# Altium PCB Powerboard in ROV V1.0.PcbDoc
Units mm, origin at the board's own origin, x right, y up, seen from the top; angles counter-clockwise.
Board outline 305.01 x 80 mm, 2 copper layers (Top Layer, Bottom Layer); 23 components, 13 nets, 142 pads, 192 vias.
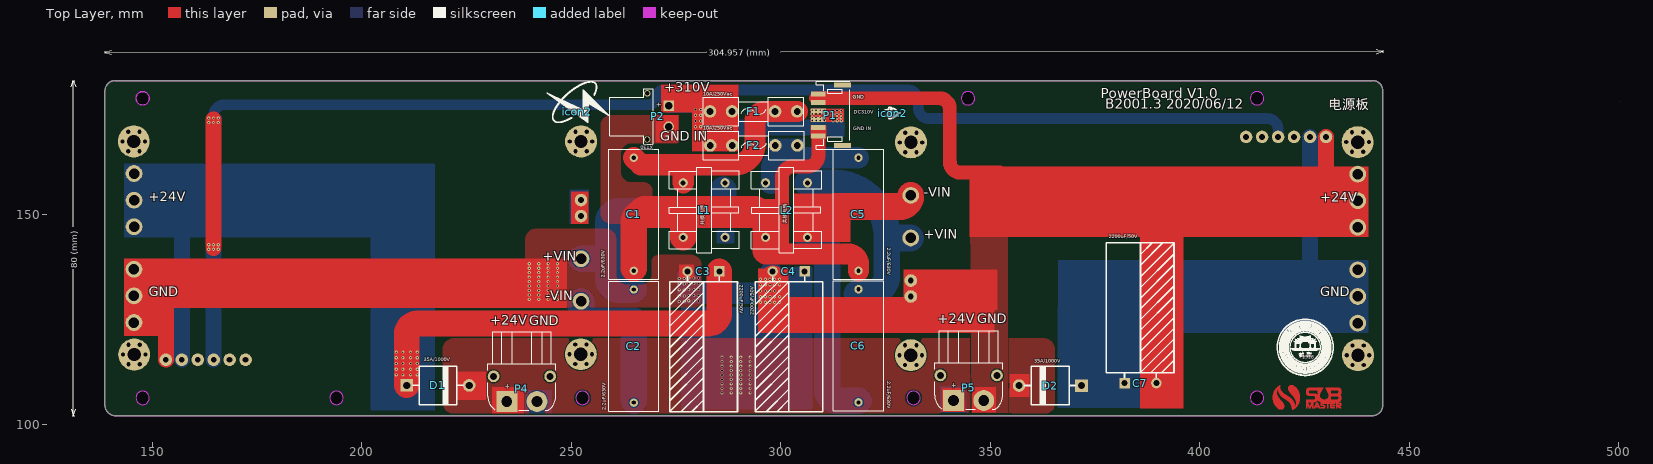
[diagram p0: Top Layer view]
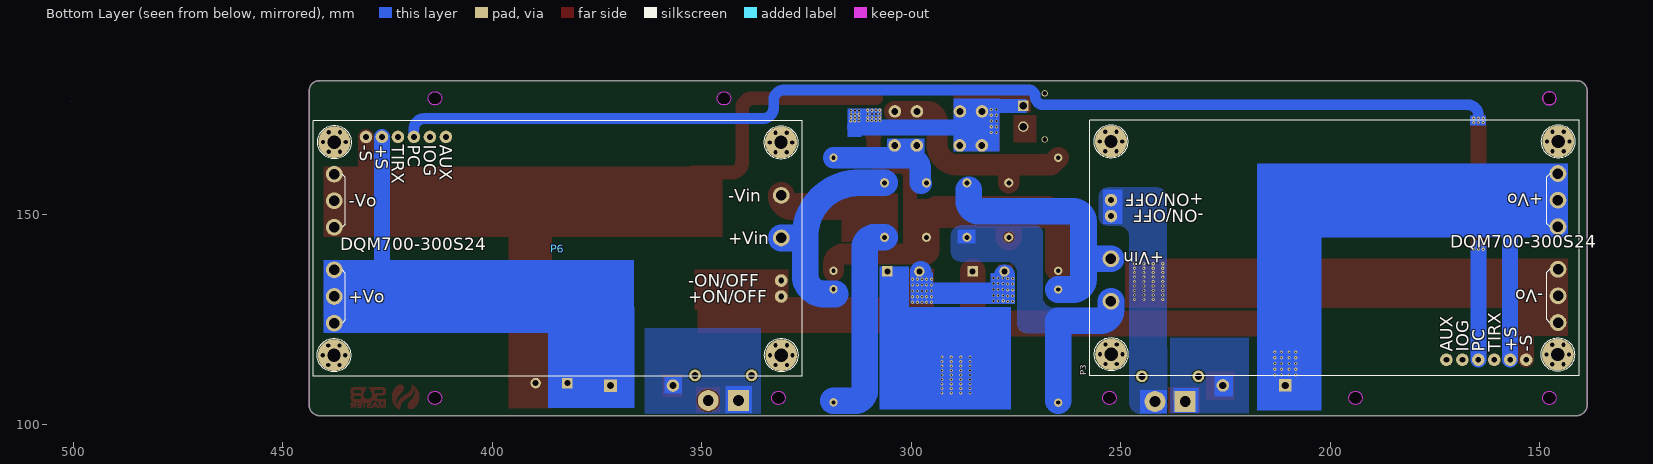
[diagram p1: Bottom Layer view, seen from below]
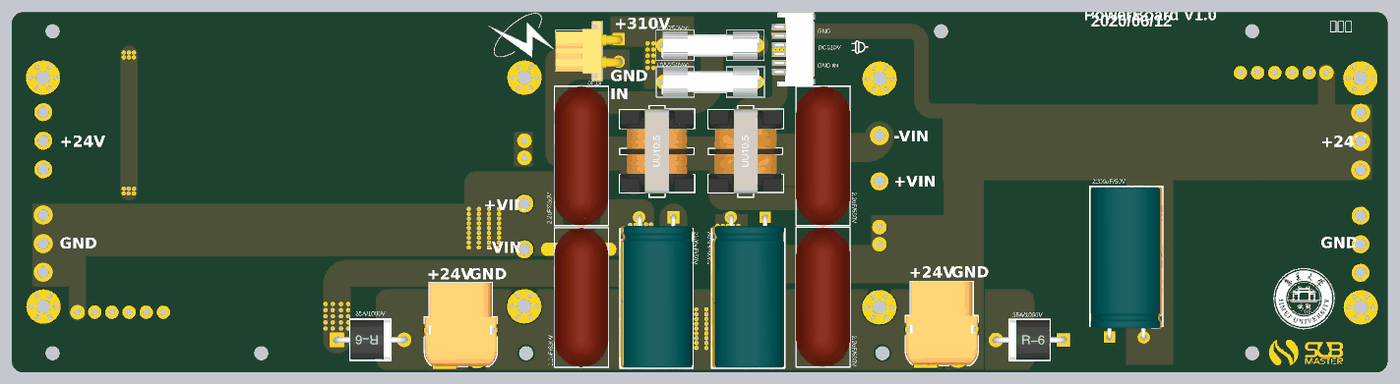
[diagram p2: 3D render of the assembled board from above, using the file's embedded part models]

## Layer stack, top to bottom
Top Solder: solder mask 0.0102, Solder Resist, Dk 3.5
Top Layer: signal copper 0.0356
Dielectric 1: dielectric 0.32, FR-4, Dk 4.8
Bottom Layer: signal copper 0.0356
Bottom Solder: solder mask 0.0102, Solder Resist, Dk 3.5

## Board outline
138.73,104.5 ccw(c141.23,104.5) 141.23,102 441.25,102 ccw(c441.25,104.488) 443.738,104.488 443.738,179.512 ccw(c441.25,179.512) 441.25,182 141.23,182 ccw(c141.23,179.5) 138.73,179.5
cut-out: 192.4,106.25 ccw(c194,106.25) 194,104.65 ccw(c194,106.25) 195.6,106.25 ccw(c194,106.25) 194,107.85 ccw(c194,106.25)
cut-out: 146.138,106.25 ccw(c147.738,106.25) 147.738,104.65 ccw(c147.738,106.25) 149.338,106.25 ccw(c147.738,106.25) 147.738,107.85 ccw(c147.738,106.25)
cut-out: 147.738,176.15 cw(c147.738,177.75) 146.138,177.75 cw(c147.738,177.75) 147.738,179.35 cw(c147.738,177.75) 149.338,177.75 cw(c147.738,177.75)
cut-out: 343.138,177.75 ccw(c344.738,177.75) 344.738,176.15 ccw(c344.738,177.75) 346.338,177.75 ccw(c344.738,177.75) 344.738,179.35 ccw(c344.738,177.75)
cut-out: 412.138,177.75 ccw(c413.738,177.75) 413.738,176.15 ccw(c413.738,177.75) 415.338,177.75 ccw(c413.738,177.75) 413.738,179.35 ccw(c413.738,177.75)
cut-out: 330.138,106.25 ccw(c331.738,106.25) 331.738,104.65 ccw(c331.738,106.25) 333.338,106.25 ccw(c331.738,106.25) 331.738,107.85 ccw(c331.738,106.25)
cut-out: 412.138,106.25 ccw(c413.738,106.25) 413.738,104.65 ccw(c413.738,106.25) 415.338,106.25 ccw(c413.738,106.25) 413.738,107.85 ccw(c413.738,106.25)
cut-out: 251.138,106.25 ccw(c252.738,106.25) 252.738,104.65 ccw(c252.738,106.25) 254.338,106.25 ccw(c252.738,106.25) 252.738,107.85 ccw(c252.738,106.25)

## Design rules (kind name [scope] priority, off if disabled: settings)
Clearance [All] p1: gap=0.254
ComponentClearance [All] p1: gap=0 collisioncheckmode=3 verticalgap=0 showdistances=FALSE
Height [All] p1: minheight=0 maxheight=32 prefheight=12.7
PolygonConnect [All] p1: connectstyle=Relief reliefconductorwidth=0.254 reliefentries=4 polygonreliefangle="90 Angle" airgapwidth=0.254
RoutingVias [All] p1: holewidth=0.711 width=1.27 viastyle="Through Hole" minholewidth=0.711 minwidth=1.27 maxholewidth=0.711 maxwidth=1.27
SolderMaskExpansion [All] p1: expansion=0.102
Width [All] p1: maxlimit=50.8 minlimit=0.254 preferedwidth=0.254 minimp=50.000000 maximp=50.000000 favimp=50.000000
28 further rules are at their usual default settings.

## Classes and differential pairs
component class "Powerboard in ROV V1.0": C1 C2 C3 C4 C5 C6 C7 D1 D2 F1 F2 L1 L2 P1 P2 P3 P4 P5 P6

## Components (designator, comment, footprint, x,y, rotation, side; value= is the part's Value field where it differs from the comment)
C1 "2.2uF/630V" "CCB 电容(27mm)" 263.449,149.867 r90 top
C2 "2.2uF/630V" "CCB 电容(27mm)" 266.497,118.821 r270 top
C3 "2200uF/50V" "CAP 7.5*16*31.5-H - GD" 280.797,119.558 r180 top
C4 "2200uF/50V" "CAP 7.5*16*31.5-H - GD" 301.117,119.558 r180 top
C5 "2.2uF/630V" "CCB 电容(27mm)" 317.068,149.867 r90 top
C6 "2.2uF/630V" "CCB 电容(27mm)" 320.116,118.891 r270 top
C7 "2200uF/50V" "CAP 7.5*16*31.5-H - GD" 386.685,126.643 r0 top
D1 "35A/1000V" R-6 217.696,109.195 r0 top
D2 "35A/1000V" R-6 364.896,109.22 r180 top
F1 "10A/250Vac" "FU 5x20" 294.234,174.295 r0 top
F2 "10A/250Vac" "FU 5x20" 294.284,166.167 r0 top
icon2 "" "LOGO 电源" 326.72,174.193 r90 top
icon2 "" LOGO_Thunder 251.435,174.6 r270 top
L1 "共模电感" UU10.5#1 281.762,151.079 r90 top
L2 "共模电感" UU10.5#2 301.668,151.409 r90 top
P1 "6PIN" PH2.0WS-6P 312.395,173.99 r90 top locked
P2 "XT30" XT30PW-F 267.183,173.431 r270 top
P3 "全砖电源模块" 全砖电源模块 198.857,141.376 r0 bottom locked
P4 "电源端子" XT60PW-F 238.69,109.117 r180 top
P5 "电源端子" XT60PW-F 345.338,109.347 r180 top
P6 "全砖电源模块" 全砖电源模块 384.581,142.519 r180 bottom locked
? "" JMU_LOGO(1.35cm) 425.273,118.085 r0 bottom
? "Comment" "Sub master logo" 420.421,106.223 r0 top

## Footprints (in the part's own frame and the unit in brackets; to place one, negate y for a bottom-side part, rotate by r counter-clockwise, add the part's x,y. Pads: shape width x height; smd on the part's side, far side on the other; paste and mask are expansions set on the pad)
"CAP 7.5*16*31.5-H - GD" [mm] "脚距7.5mm直径16mm高度31.5mm"
  rect 2.5x2.5 hole 1.4: 1(-4.593,-16.864)
  round 2.5 hole 1.4: 2(3.007,-16.864)
  silkscreen extent -8.92,-15.63 7.21,16.63, body extent -8.84,-17.36 7.17,16.55, height 16.03
"CCB 电容(27mm)" [mm]
  round 2 hole 1: 1(-13.291,-1.524) 2(13.709,-1.524)
  silkscreen extent -15.29,-7.52 15.71,4.48, body extent -15.29,-7.52 15.71,4.48, height 23.5
"FU 5x20" [mm] "5*20保险管底座夹子"
  round 3 hole 1.6: 1(-11.086,0.33) 1(-5.816,0.33) 2(4.444,0.33) 2(9.714,0.33)
  silkscreen extent -12.69,-3.05 11.31,3.71, body extent -11.49,-2.82 10.11,3.48, height 9.77
JMU_LOGO(1.35cm) [mm]
"LOGO 电源" [mm]
  silkscreen extent -1.47,-1.85 1.57,1.77
LOGO_Thunder [mm]
  silkscreen extent -7.24,-7.19 2.67,7.62
PH2.0WS-6P [mm]
  rect 1.2x4 smd: 0(-7.453,-2.365) 0(6.947,-2.365)
  rect 1.2x3.5 smd: 1(-5.253,3.385) 2(-3.253,3.385) 3(-1.253,3.385) 4(0.747,3.385) 5(2.747,3.385) 6(4.747,3.385)
  silkscreen extent -8.35,-4.14 7.84,3.86, body extent -8.25,-4.01 7.75,4.59, height 5.55
R-6 [mm] "二极管"
  rect 3x3 hole 1.7: 1(-6.917,0.025)
  round 3 hole 1.7: 2(7.983,0.025)
  silkscreen extent -5.52,-4.55 6.56,4.6, body extent -7.57,-4.38 8.63,4.43, height 8.85
"Sub master logo" [mm]
  Top Layer drawing of 1550 lines, arcs and shapes, not listed
UU10.5#1 [mm] "18*16*20mm(长宽高）"
  round 2.2 hole 1.2: 1(-6.5,5) 2(-6.5,-5) 3(6.5,-5) 4(6.5,5)
  silkscreen extent -10.16,-8.38 10.16,8.38, body extent -9.4,-8 9.4,8, height 21.05
UU10.5#2 [mm] "18*16*20mm(长宽高）"
  round 2.2 hole 1.2: 1(-6.83,5.254) 2(-6.83,-4.746) 3(6.17,-4.746) 4(6.17,5.254)
  silkscreen extent -10.49,-8.13 9.83,8.64, body extent -9.73,-7.75 9.07,8.25, height 21.05
XT30PW-F [mm] "ĸͷ"
  rect 2.5x2.5 hole 1.8: 1(-2.566,6.095)
  round 2.5 hole 1.8: 2(2.434,6.095)
  round 1.5 hole 1.1: ""(-5.5,1) ""(5.5,1)
  silkscreen extent -6.55,-7.95 6.71,2.41, body extent -6.55,-7.95 6.75,6.95, height 5
XT60PW-F [mm] "ĸͷ"
  round 2.8 hole 1.7: 0(-6.305,-2.268) 0(7.195,-2.268)
  rect 5x5 hole 2.6: 1(4.045,3.732)
  round 5 hole 2.6: 2(-3.155,3.732)
  silkscreen extent -7.66,-12.87 8.54,5.83, body extent -7.56,-12.87 8.44,5.75, height 8.65
全砖电源模块 [mil]
  round 40 hole 40: 0(-2202,-1026.57) 0(-2198.05,975.51) 0(-2149,-1118.37) 0(-2149,-934.78) 0(-2145.05,883.71) 0(-2145.05,1067.31) 0(-2043,-1118.37) 0(-2043,-934.78) 0(-2039.05,883.71) 0(-2039.05,1067.31) 0(-1990,-1026.57) 0(-1986.05,975.51) 0(1998.83,972.78) 0(2000.98,-1026.35) 0(2051.83,880.98) 0(2051.83,1064.57) 0(2053.98,-1118.15) 0(2053.98,-934.56) 0(2157.83,880.98) 0(2157.83,1064.57) 0(2159.98,-1118.15) 0(2159.98,-934.56) 0(2210.83,972.78) 0(2212.98,-1026.35)
  round 300 hole 125: 0(-2096,-1026.57) 0(-2092.05,975.51) 0(2104.83,972.78) 0(2106.98,-1026.35)
  round 157.48 hole 98.43: 1(2106.61,474.79) 2(2106.61,74.79) 5(-2093.79,-725.21) 5(-2093.79,-475.21) 5(-2093.79,-225.21) 6(-2094.18,174.79) 6(-2094.18,424.79) 6(-2094.18,674.79)
  round 118.11 hole 55.12: 3(2106.61,-325.21) 4(2106.61,-475.21) 7(-1794.97,1024.79) 8(-1644.97,1024.79) 9(-1494.97,1024.79) 10(-1344.97,1024.79) 11(-1194.97,1024.79) 12(-1044.97,1024.79)
  silkscreen extent -2293,-1226 2305,1176, body extent -2293,-1226 2305,1176, height 500

## Part data
C1 C2 C5 C6: library part Cap2, "无极性CCB电容"
C3 C4 C7: library part Cap3, "直插极性电容"
D1 D2: library part Diode, "二极管"
F1 F2: library part Fuse, "保险丝"
P1: library part 接线端子-6PIN
P2: library part 电源端子
P3 P6: library part 全砖电源模块（迪龙）

## Via types
v1: diameter 0.762, hole 0.381, Top Layer to Bottom Layer, 104 vias
v2: diameter 0.762, hole 0.406, Top Layer to Bottom Layer, 88 vias

## Nets (pads, with @x,y where several pads share a name; then routed paths per layer and width w, separated by ;. In a path a pad name is that pad's centre, name@x,y a point inside that pad or via, vN(x,y) a via of type N, cw(c..) or ccw(c..) an arc to the next point about the centre after c; other vN are vias at no path point)
DC24.0V_1: C3.1 D1.1 P3.5 P3.8 | length 133.6
  Top Layer w6.096: D1.1 210.779,111.735 210.779,121.463 cw(c213.319,121.463) 213.319,124.003 282.85,124.003 ccw(c282.85,126.543) 285.39,126.543 C3.1
  Bottom Layer w3.81: P3.8 157.074,148.54 cw(c157.556,148.54) 157.556,149.022
  other v1: 208.255,111.735 209.855,111.735 211.684,111.735 213.284,111.735 208.255,113.093 209.855,113.093 211.684,113.093 213.284,113.093 208.255,114.452 209.855,114.452 211.684,114.452 213.284,114.452 208.255,115.811 209.855,115.811 211.684,115.811 213.284,115.811 208.255,117.17 209.855,117.17 211.684,117.17 213.284,117.17
DC24.0V_2: C7.1 D2.1 P6.5 P6.8 | length 35.2
  Bottom Layer w3.81: P6.8 426.364,135.713 ccw(c427.888,135.713) 427.888,134.188
DC310V: F1.1 F2.1 P1.3 P1.4 P2.1 | length 24.5
  Bottom Layer w3.81: 288.976,170.815 313.258,170.815 ccw(c313.258,170.967) 313.411,170.967
  other v2: 279.679,169.621 280.949,169.621 279.679,170.98 280.949,170.98 279.679,172.339 280.949,172.339 312.53,172.364 313.504,172.364 314.477,172.364 307.543,172.441 308.491,172.441 309.465,172.441 310.439,172.441 312.505,173.126 313.478,173.126 314.452,173.126 307.543,173.203 308.466,173.203 309.44,173.203 310.413,173.203 279.679,173.698 280.949,173.698 312.479,173.939 313.453,173.939 314.427,173.939 307.543,174.015 308.441,174.015 309.414,174.015 310.388,174.015 312.505,174.828 313.478,174.828 314.452,174.828 307.543,174.904 308.466,174.904 309.44,174.904 310.413,174.904 279.679,175.057 280.949,175.057
GND: C3.2 C4.2 C7.2 P1.5 P1.6 P3.3 P3.4 P3.6 P3.7 P4.2 P5.2 P6.3 P6.4 P6.6 P6.7 | length 119.3
  Top Layer w3.302: 308.483,177.775 337.845,177.775 cw(c337.845,175.235) 340.385,175.235 340.385,162.56 ccw(c342.925,162.56) 342.925,160.02 352.323,160.02
  Top Layer w3.81: P3.7 153.264,127.306 ; P6.7 430.174,153.01 ccw(c430.428,153.01) 430.428,152.756
  Top Layer w6.35: 298.11,129.921 298.11,134.62
  Bottom Layer w5.08: C3.2@277.79,135.534 277.79,133.782 ccw(c280.33,133.782) 280.33,131.242 295.224,131.242 ccw(c295.224,133.782) 297.764,133.782 C4.2@297.764,136.422
  other v1: 240.03,129.743 242.265,129.743 244.5,129.743 246.736,129.743 240.03,130.81 242.265,130.81 244.5,130.81 246.736,130.81 240.03,131.877 242.265,131.877 244.5,131.877 246.736,131.877 240.03,132.944 242.265,132.944 244.5,132.944 246.736,132.944 240.03,134.01 242.265,134.01 244.5,134.01 246.736,134.01 240.03,135.077 242.265,135.077 244.5,135.077 246.736,135.077 240.03,136.144 242.265,136.144 244.5,136.144 246.736,136.144 240.03,137.211 242.265,137.211 244.5,137.211 246.736,137.211 240.03,138.278 242.265,138.278 244.5,138.278 246.736,138.278
  other v2: 295.173,129.057 296.367,129.057 297.485,129.057 298.577,129.057 299.771,129.057 275.819,129.261 277.012,129.261 279.298,129.362 280.416,129.362 278.079,129.413 295.173,130.378 296.367,130.378 297.485,130.378 298.577,130.378 299.771,130.378 275.819,130.581 277.012,130.581 278.105,130.683 279.298,130.683 280.416,130.683 295.173,131.775 296.367,131.775 297.485,131.775 298.577,131.775 299.771,131.775 275.819,132.029 277.012,132.029 278.105,132.131 279.298,132.131 280.416,132.131 295.173,133.223 296.367,133.223 297.485,133.223 298.577,133.223 299.771,133.223 275.819,133.426 277.012,133.426 278.105,133.528 279.298,133.528 280.416,133.528 295.173,134.544 296.367,134.544 297.485,134.544 298.577,134.544 299.771,134.544 275.819,134.747 277.012,134.747 278.105,134.849 279.298,134.849 280.416,134.849
GND_IN: C1.1 C5.1 L1.1 L2.1 P1.1 P1.2 P2.2 | length 117.9
  Top Layer w3.302: 300.355,140.589 300.355,158.928 cw(c302.895,158.928) 302.895,161.468 306.47,161.468 ccw(c306.47,164.008) 309.01,164.008 P1.1
  Top Layer w5.08: 296.414,140.589 300.355,140.589 316.052,140.589 cw(c316.052,138.049) 318.592,138.049 C5.1
  Top Layer w6.35: C1.1@264.973,137.16 264.973,148.082 cw(c267.513,148.082) 267.513,150.622 ; L1.1 276.762,150.448 cw(c276.936,150.448) 276.936,150.622 ; 293.874,150.622 cw(c293.874,148.082) 296.414,148.082 L2.1 296.414,141.351
  Top Layer w7.62: 267.513,150.622 276.936,150.622 293.874,150.622
NetC1_2: C1.2 F1.2 L1.4 | length 53.6
  Top Layer w5.08: C1.2 266.649,161.9 276.835,161.9 ; L1.4 276.762,161.827 cw(c276.835,161.827) 276.835,161.9 ; F1.2@303.948,174.625 298.678,174.625 296.443,174.625 ccw(c296.443,172.085) 293.903,172.085 293.903,166.756 cw(c289.047,166.756) 289.047,161.9 276.835,161.9
NetC2_1: C2.1 L1.3 P3.2 | length 62
  Bottom Layer w6.35: P3.2 256.388,139.477 ccw(c256.388,142.017) 258.928,142.017 ; C2.1 261.468,132.112 cw(c261.468,134.652) 258.928,134.652 258.928,142.017 ; 286.329,155.931 286.329,153.314 cw(c283.789,153.314) 283.789,150.774 261.468,150.774 ccw(c261.468,148.234) 258.928,148.234 258.928,142.017
NetC2_2: C2.2 L1.2 P3.1 | length 35.3
  Bottom Layer w6.35: P3.1 252.364,127.221 ccw(c254.904,127.221) 254.904,124.681 264.973,124.681 C2.2@264.973,105.537
NetC5_2: C5.2 F2.2 L2.4 | length 25.9
  Bottom Layer w5.08: 297.637,157.404 ccw(c297.637,157.658) 297.891,157.658 297.891,161.036 cw(c300.431,161.036) 300.431,163.576 C5.2
NetC6_1: C6.1 L2.3 P6.2 | length 51
  Bottom Layer w6.35: L2.3 312.584,157.579 cw(c312.584,144.789) 325.374,144.789 ; 318.186,131.038 320.865,131.038 ccw(c320.865,135.547) 325.374,135.547 325.374,144.789 ; P6.2 327.116,144.419 cw(c327.116,148.701) 325.374,144.789
NetC6_2: C6.2 L2.2 P6.1 | length 68.8
  Top Layer w6.35: 313.004,151.79 cw(c313.131,151.79) 313.131,151.917 328.534,151.917 ccw(c328.534,154.457) 331.074,154.457 P6.1
  Bottom Layer w6.35: L2.2 308.61,144.579 cw(c308.61,142.039) 311.15,142.039 311.15,108.069 ccw(c313.69,108.069) 313.69,105.529 C6.2@318.592,105.529
OUTPUT_24V: C4.1 D1.2 D2.2 P4.1 P5.1
  other v1: 286.004,107.442 288.239,107.442 290.474,107.442 292.71,107.442 286.004,108.509 288.239,108.509 290.474,108.509 292.71,108.509 286.004,109.576 288.239,109.576 290.474,109.576 292.71,109.576 286.004,110.642 288.239,110.642 290.474,110.642 292.71,110.642 286.004,111.709 288.239,111.709 290.474,111.709 292.71,111.709 286.004,112.776 288.239,112.776 290.474,112.776 292.71,112.776 286.004,113.843 288.239,113.843 290.474,113.843 292.71,113.843 286.004,114.91 288.239,114.91 290.474,114.91 292.71,114.91 286.004,115.976 288.239,115.976 290.474,115.976 292.71,115.976
PC: P3.10 P6.10 | length 323.4
  Top Layer w3.81: v1@164.694,142.063 v1@164.694,172.669
  Bottom Layer w2.54: v1(164.668,173.025) 164.668,173.685 cw(c167.208,173.685) 167.208,176.225 268.493,176.225 ccw(c268.493,178.189) 270.457,178.189 cw(c272.009,178.189) 272.009,179.741 330.352,179.741 cw(c330.352,177.201) 332.892,177.201 332.892,175.463 ccw(c335.432,175.463) 335.432,172.923 416.204,172.923 cw(c416.204,170.383) 418.744,170.383 P6.10
  Bottom Layer w3.81: P3.10 v1@164.694,142.063
  other v1: 163.525,141.732 164.617,141.732 165.76,141.732 163.525,142.799 164.617,142.799 165.76,142.799 163.525,171.958 164.668,171.958 165.76,171.958 163.525,173.025 165.76,173.025
pads on no net: P1.0 P2. P3.0 P3.9 P3.11 P3.12 P4.0 P5.0 P6.0 P6.9 P6.11 P6.12

## Polygon pours and split planes (outlines as drawn)
GND on Bottom Layer "Top Layer-No Net" (solid, remove dead copper, pour order 40): 238.989,105.308 238.989,103.962 ccw(c240.462,103.962) 240.462,102.489 245.44,102.489 ccw(c245.44,105.029) 247.98,105.029 247.98,143.027 247.98,144.78 cw(c250.52,144.78) 250.52,147.32 253.238,147.32 ccw(c253.238,149.377) 255.295,149.377 255.295,154.305 ccw(c253.06,154.305) 253.06,156.54 248.945,156.54 241.605,156.54 ccw(c241.605,154) 239.065,154 239.065,130.708
NetC2_2 on Bottom Layer "Top Layer-No Net" (solid, remove dead copper, pour order 32): 286.664,147.422 288.061,147.422 cw(c288.061,144.882) 290.601,144.882 290.601,144.094 290.601,141.249 cw(c288.061,141.249) 288.061,138.709 286.614,138.709 277.317,138.709 ccw(c277.317,136.169) 274.777,136.169 274.777,134.239 274.777,124.206 cw(c272.237,124.206) 272.237,121.666 264.338,121.666 cw(c264.338,121.945) 264.058,121.945 264.058,127.787 266.065,127.787 ccw(c266.065,130.327) 268.605,130.327 268.605,134.518 268.605,145.39 cw(c270.637,145.39) 270.637,147.422
OUTPUT_24V on Bottom Layer "Top Layer-No Net" (solid, remove dead copper, pour order 36): 238.15,102.616 238.201,102.667 238.201,120.599 219.278,120.599 219.431,120.447 219.431,102.464
OUTPUT_24V on Bottom Layer "Top Layer-No Net" (solid, remove dead copper, pour order 26): 335.94,122.784 cw(c335.991,122.784) 335.991,122.834 363.652,122.834 363.652,102.362 ccw(c363.601,102.362) 363.601,102.413 335.915,102.413
OUTPUT_24V on Top Layer "Top Layer-No Net" (solid, remove dead copper, pour order 50): 219.405,115.214 219.405,117.907 cw(c221.945,117.907) 221.945,120.447 228.117,120.447 362.864,120.447 cw(c362.864,117.907) 365.404,117.907 365.404,104.775 cw(c363.159,104.775) 363.159,102.529 341.3,102.529 221.971,102.529 cw(c221.971,105.069) 219.431,105.069 219.431,113.047
GND on Top Layer "Top Layer-No Net" (solid, remove dead copper, pour order 22): 345.567,102.565 cw(c345.669,102.565) 345.669,102.667 354.228,102.667 354.228,151.816 cw(c353.517,151.816) 353.517,151.105 345.211,151.105
GND_IN on Top Layer "Top Layer-No Net" (solid, remove dead copper, pour order 56): 275.692,173.736 259.563,173.736 ccw(c259.563,171.196) 257.023,171.196 257.023,170.18 257.023,150.368 ccw(c259.563,150.368) 259.563,147.828 261.493,147.828 269.164,147.828 ccw(c269.164,148.082) 269.418,148.082 269.418,155.626 ccw(c267.36,155.626) 267.36,157.683 264.363,157.683 cw(c264.363,160.223) 261.823,160.223 261.823,163.805 261.823,164.44 cw(c264.363,164.44) 264.363,166.98 265.151,166.98 275.031,166.98 ccw(c275.031,167.665) 275.717,167.665
GND on Top Layer "Top Layer-No Net" (solid, remove dead copper, pour order 60): 272.313,127.889 279.73,127.889 ccw(c279.73,129.261) 281.102,129.261 281.102,137.846 ccw(c278.562,137.846) 278.562,140.386 277.368,140.386 270.942,140.386 ccw(c270.942,138.659) 269.214,138.659 269.214,135.814 cw(c266.674,135.814) 266.674,133.274 263.906,133.274 263.347,133.274 cw(c263.347,135.814) 260.807,135.814 260.807,136.093 260.807,144.069 ccw(c258.267,144.069) 258.267,146.609 257.099,146.609 241.605,146.609 ccw(c241.605,144.069) 239.065,144.069 239.065,141.961 239.065,129.21 ccw(c240.386,129.21) 240.386,127.889 273.202,127.889

## Keep-outs
Keep-Out Layer:
  circle w0.254: c194,106.25 r1.6
  circle w0.254: c147.738,106.25 r1.6
  circle w0.254: c147.738,177.75 r1.6
  circle w0.254: c344.738,177.75 r1.6
  circle w0.254: c413.738,177.75 r1.6
  circle w0.254: c331.738,106.25 r1.6
  circle w0.254: c413.738,106.25 r1.6
  circle w0.254: c252.738,106.25 r1.6
  lines w0.2: 138.73,104.5 ccw(c141.23,104.5) 141.23,102 441.25,102 ccw(c441.25,104.488) 443.738,104.488 443.738,179.512 ccw(c441.25,179.512) 441.25,182 141.23,182 ccw(c141.23,179.5) 138.73,179.5 138.73,104.5
  lines w0.254: 500.5,177 500.5,177

## Other copper
Top Layer:
  rectangle net OUTPUT_24V: 231.14,102.514 238.76,108.788
  rectangle net OUTPUT_24V: 222.885,105.744 229.667,112.497
  rectangle net GND: 345.643,102.723 351.46,108.839
  rectangle net OUTPUT_24V: 338.506,102.861 344.048,108.61
  rectangle net GND: 250.012,147.777 254.203,155.524
  rectangle net DC310V: 278.892,164.998 289.992,177.114
  rectangle net NetC6_2: 303.225,143.408 316.687,155.042
  rectangle net GND: 143.231,127.737 249.043,139.471
  rectangle net GND: 143.231,121.056 155.169,139.471
  rectangle net GND: 345.11,144.704 440.284,161.417
  rectangle net GND: 385.75,103.683 396.164,154.356
  region net DC310V: 289.992,181.102 271.45,181.102 271.45,174.358 289.992,174.358
  region net OUTPUT_24V: 359.359,111.963 354.584,111.963 354.584,106.502 359.359,106.502
  region net DC310V: 315.104,175.285 307.188,175.285 307.188,172.085 315.104,172.085
  region net GND_IN: 310.921,171.348 307.188,171.348 307.188,168.173 310.921,168.173
  region net GND_IN: 275.692,173.736 270.104,173.736 270.104,167.157 275.692,167.157
  region net GND_IN: 301.396,153.772 293.624,153.772 293.624,146.202 301.396,146.202
  region net GND: 301.91,137.16 294.64,137.16 294.64,123.76 301.91,123.76
  region net GND: 351.079,130.277 294.589,130.277 294.589,121.717 351.079,121.717
  region net GND: 351.79,136.881 329.278,136.881 329.278,127.279 351.79,127.279
  region net GND: 279.298,138.133 275.706,138.133 275.706,134.849 279.298,134.849
Bottom Layer:
  rectangle net GND: 238.997,102.464 245.389,108.137
  rectangle net OUTPUT_24V: 354.813,107.239 358.877,111.277
  rectangle net OUTPUT_24V: 338.049,102.616 344.399,109.068
  rectangle net NetC2_2: 284.734,143.078 288.95,146.38
  rectangle net GND: 249.58,147.803 254.213,155.981
  rectangle net OUTPUT_24V: 223.215,106.578 227.711,111.43
  rectangle net OUTPUT_24V: 231.521,102.667 237.465,108.61
  region net PC: 166.624,171.247 166.624,173.609 162.865,173.609 162.865,171.247
  rectangle net DC310V: 278.943,165.024 289.916,177.673
  rectangle net NetC5_2: 296.926,164.16 305.791,168.148
  rectangle net DC24.0V_1: 143.332,144.501 217.449,162.179
  rectangle net DC24.0V_1: 202.108,103.276 217.475,162.103
  rectangle net DC24.0V_2: 366.166,121.793 440.284,139.141
  rectangle net DC24.0V_2: 366.116,103.861 386.69,127.991
  rectangle net OUTPUT_24V: 300.558,103.53 307.569,137.617
  rectangle net OUTPUT_24V: 276.174,103.53 307.569,127.965
  region net DC310V: 315.214,175.285 307.188,175.285 307.188,171.933 315.214,171.933
  region net DC310V: 315.214,175.285 311.861,175.285 311.861,168.504 315.214,168.504
  region net GND: 281.102,136.042 275.285,136.042 275.285,128.702 281.102,128.702
  region net GND: 300.228,136.144 294.843,136.144 294.843,128.829 300.228,128.829
  region net DC310V: 280.441,177.597 272.517,177.597 272.517,174.193 280.441,174.193

## Silkscreen, mask and mechanical layers (free items; w line width, h text height)
Top Overlay:
  lines w0.254: 130.722,103.524 131.23,102 ; 130.722,180.476 131.23,182 ; 130.976,102 131.484,102 ; 130.976,182 131.484,182 ; 131.23,136.896 131.23,102 ; 131.23,147.104 131.23,182 ; 131.738,103.524 131.23,102 ; 131.738,180.476 131.23,182 ; 138.73,188.516 138.73,189.024 ; 140.254,188.263 138.73,188.77 ; 140.254,189.279 138.73,188.77 ; 282.423,188.843 138.73,188.77 ; 299.994,188.852 443.687,188.924 ; 442.163,188.415 443.687,188.924 ; 442.163,189.431 443.687,188.924 ; 443.687,188.67 443.687,189.178
  text "304.957 (mm)" at 282.677,187.929 h1.52 r0.03
  text "+310V" at 272.186,178.435 h3.81
  text "GND" at 317.271,177.343 h1.52
  text "PowerBoard V1.0" at 376.453,176.962 h4.06
  text "B2001.3 2020/06/12" at 377.52,174.422 h4.06
  text "电源板" at 430.886,174.244 h4.06
  text "DC310V" at 317.449,173.711 h1.52
  text "GND IN" at 317.297,169.723 h1.52
  text "GND IN" at 271.297,166.802 h3.81
  text "-VIN" at 334.112,153.441 h3.81
  text "+24V" at 149.25,152.298 h3.81
  text "+24V" at 428.83,152.248 h3.81
  text "+VIN" at 334.112,143.408 h3.81
  text "+VIN" at 243.256,138.176 h3.81
  text "80 (mm)" at 132.144,137.15 h1.52 r90
  text "GND" at 428.804,129.718 h3.81
  text "GND" at 149.2,129.616 h3.81
  text "-VIN" at 243.908,128.727 h3.81
  text "+24V" at 337.556,123.218 h3.81
  text "GND" at 346.928,123.19 h3.81
  text "+24V" at 230.683,122.812 h3.81
  text "GND" at 240.055,122.784 h3.81
Bottom Overlay:
  text "DQM700-300S24" at 171.348,140.97 h5.08
  text "DQM700-300S24" at 436.347,140.411 h5.08
Top Solder:
  lines w3.048: 257.556,129.311 271.221,129.311
Bottom Solder:
  lines w5.08: 280.33,131.242 295.224,131.242

## Text inside footprints (layer, text, board x,y; h text height)
P2: Top Overlay "+" at 272.009,175.539 h2 r90
P3: Bottom Overlay "+Vin" at 239.686,140.977 h3 r180; Bottom Overlay "-ON/OFF" at 230.189,151.137 h3 r180; Bottom Overlay "+ON/OFF" at 230.189,154.947 h3 r180; Bottom Overlay "AUX" at 170.814,117.272 h3 r270; Bottom Overlay "IOG" at 167.004,117.272 h3 r270; Bottom Overlay "PC" at 163.194,117.272 h3 r270; Bottom Overlay "TIRX" at 159.384,117.272 h3 r270; Bottom Overlay "+S" at 155.574,117.272 h3 r270; Bottom Overlay "-S" at 151.764,117.272 h3 r270; Bottom Overlay "-Vo" at 149.163,132.087 h3 r180; Bottom Overlay "+Vo" at 149.163,154.947 h3 r180
P4: Top Overlay "+" at 234.135,107.923 h2
P5: Top Overlay "+" at 340.784,108.153 h2
P6: Bottom Overlay "-Vin" at 343.752,153.079 h3; Bottom Overlay "+Vin" at 343.752,142.919 h3; Bottom Overlay "-ON/OFF" at 353.249,132.759 h3; Bottom Overlay "+ON/OFF" at 353.249,128.949 h3; Bottom Overlay "AUX" at 412.624,166.624 h3 r90; Bottom Overlay "IOG" at 416.434,166.624 h3 r90; Bottom Overlay "PC" at 420.244,166.624 h3 r90; Bottom Overlay "TIRX" at 424.054,166.624 h3 r90; Bottom Overlay "+S" at 427.864,166.624 h3 r90; Bottom Overlay "-S" at 431.674,166.624 h3 r90; Bottom Overlay "-Vo" at 434.275,151.809 h3; Bottom Overlay "+Vo" at 434.275,128.949 h3
?: Top Overlay "1918" at 424.514,115.194 h1.27